# Altium PCB LM317T_PCB.PcbDoc
Units mm, origin at the board's own origin, x right, y up, seen from the top; angles counter-clockwise.
Board outline 70 x 40 mm, 2 copper layers (Top Layer, Bottom Layer); 14 components, 7 nets, 34 pads, 0 vias.
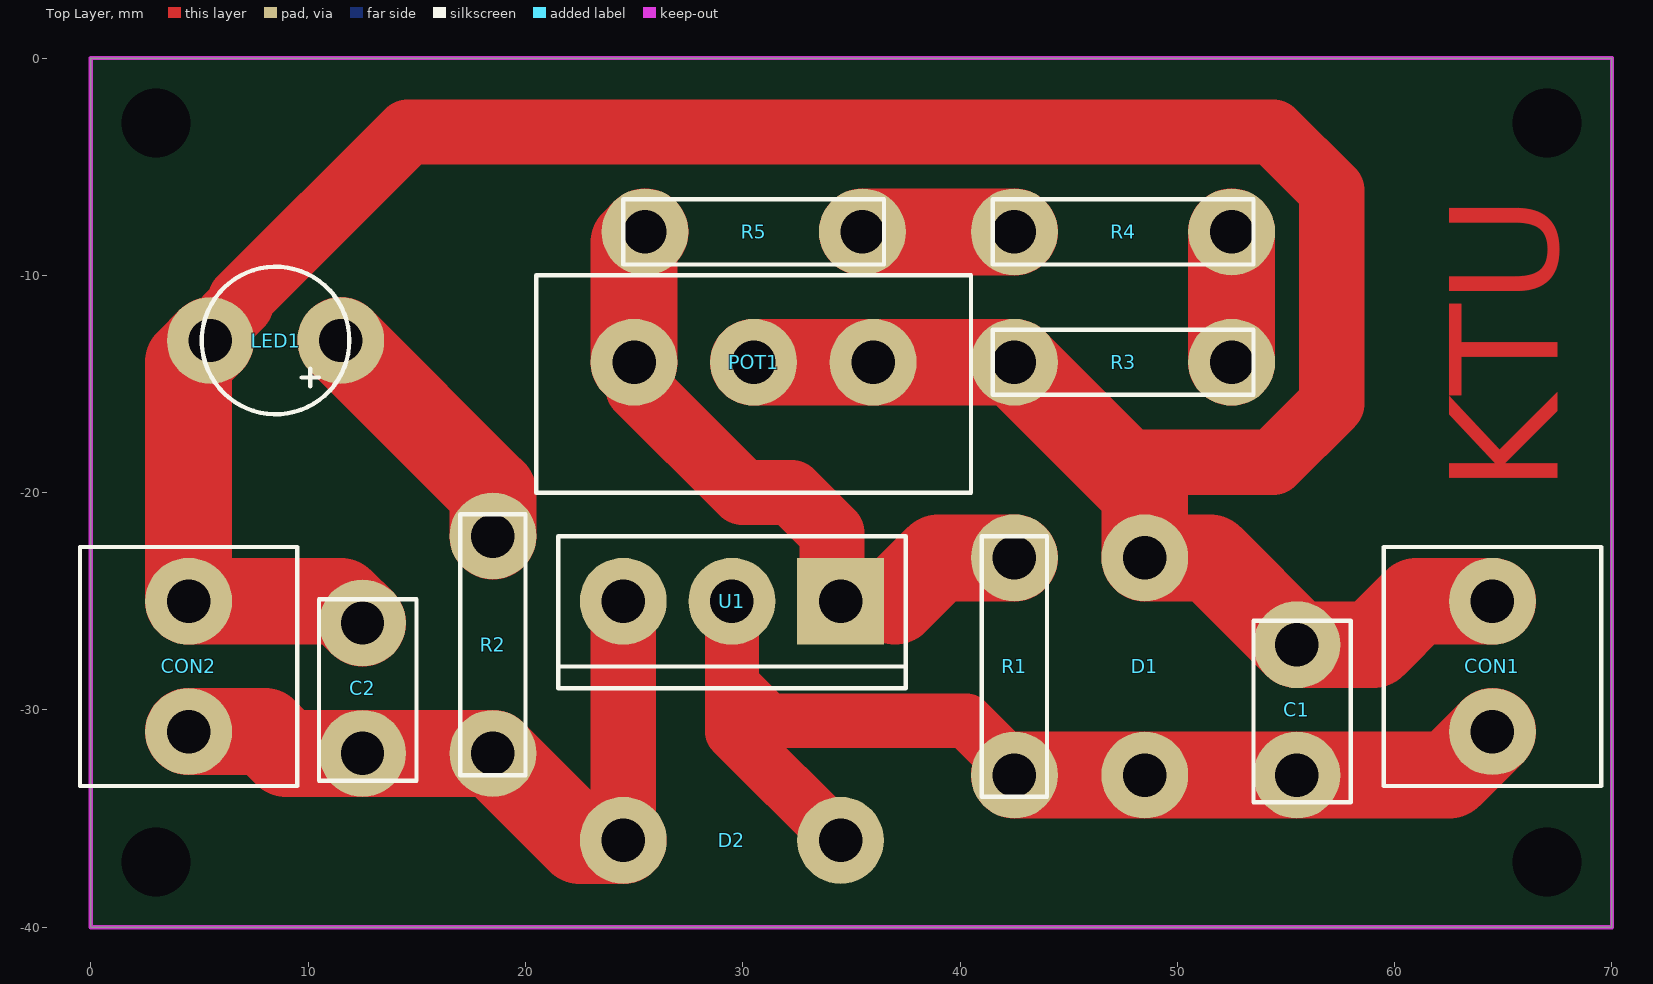
[diagram p0: Top Layer view]
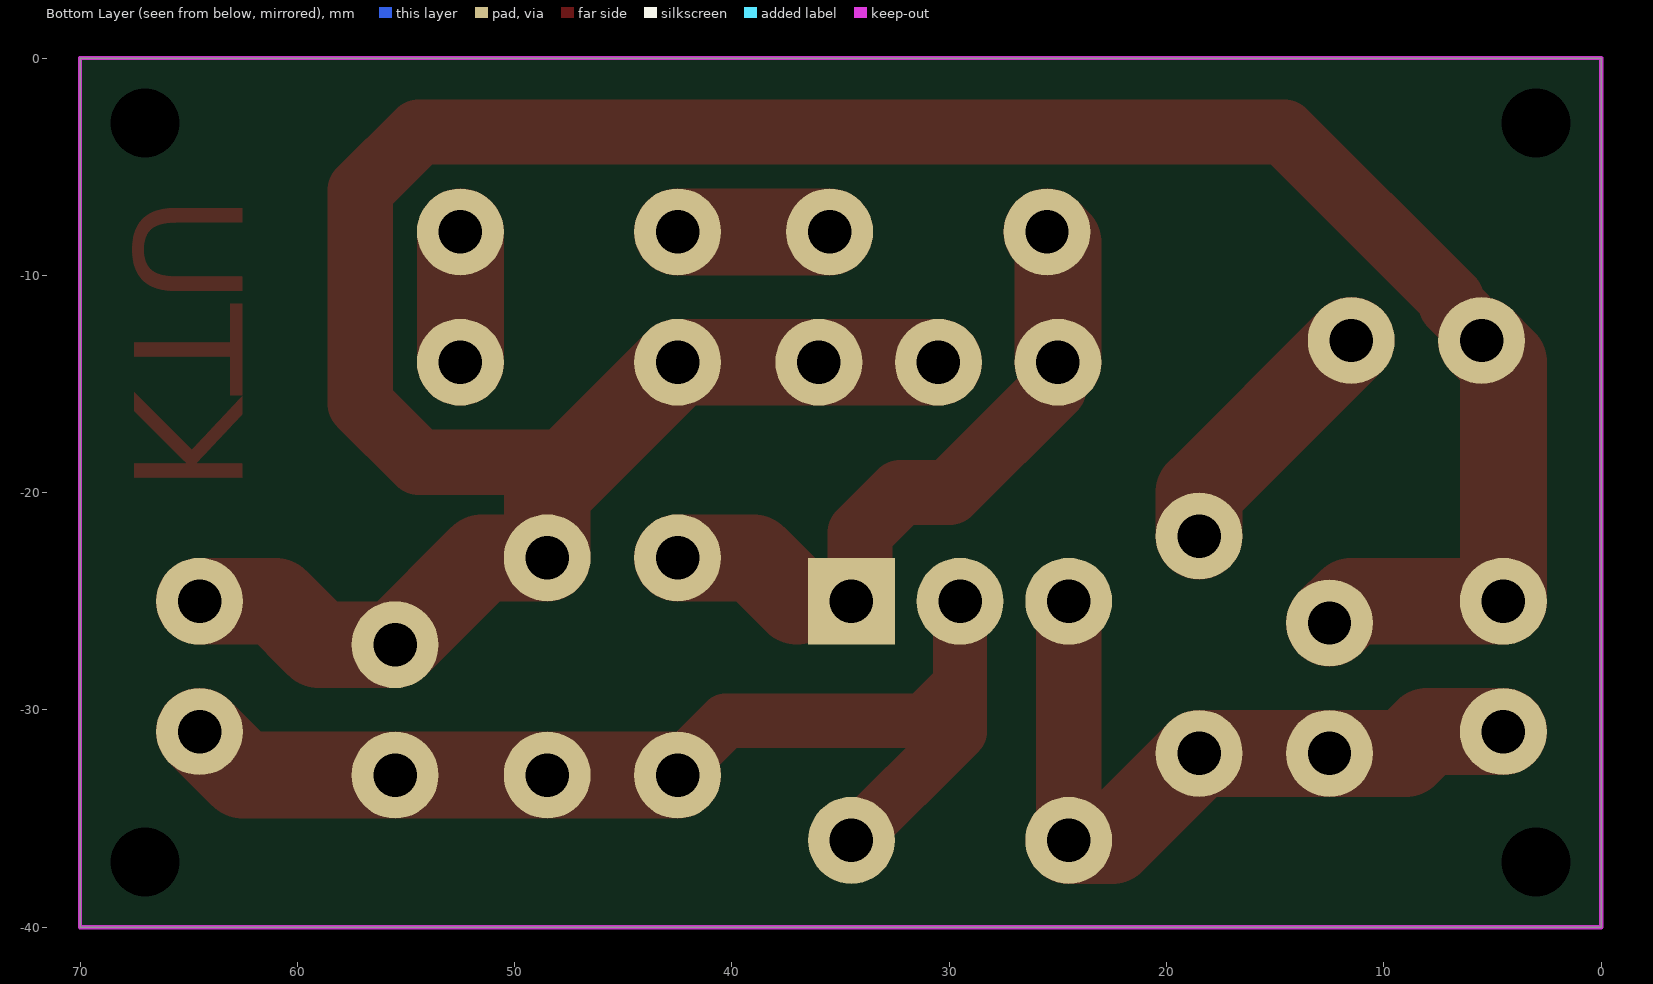
[diagram p1: Bottom Layer view, seen from below]
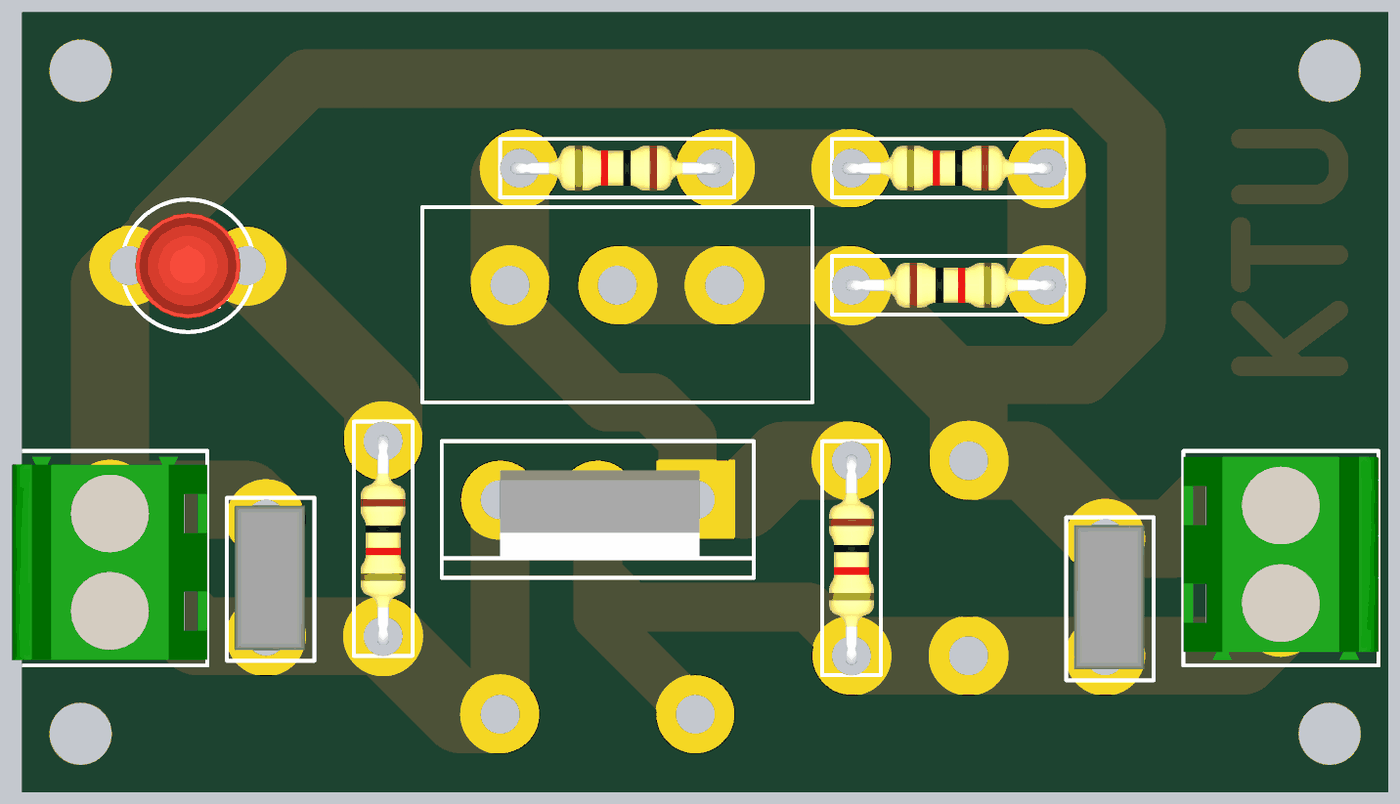
[diagram p2: 3D render of the assembled board from above, using the file's embedded part models]

## Layer stack, top to bottom
Top Solder: solder mask 0.0102, Solder Resist, Dk 3.5
Top Layer: signal copper 0.0356
Dielectric 1: dielectric 0.32, FR-4, Dk 4.8
Bottom Layer: signal copper 0.0356
Bottom Solder: solder mask 0.0102, Solder Resist, Dk 3.5

## Board outline
0,-40 70,-40 70,0 0,0

## Design rules (kind name [scope] priority, off if disabled: settings)
Clearance [All] p1: gap=1.1 ignorepadtopadclearanceinfootprint=FALSE
PlaneClearance [All] p1: clearance=2
PlaneConnect [All] p1: planeconnectstyle=Relief reliefexpansion=2 reliefentries=4 reliefconductorwidth=1 reliefairgap=0.5
PolygonConnect [All] p1: connectstyle=Relief reliefconductorwidth=1 reliefentries=4 polygonreliefangle="90 Angle" airgapwidth=0.2
RoutingVias [All] p1: holewidth=0.711 width=1.27 viastyle="Through Hole" minholewidth=0.711 minwidth=1.27 maxholewidth=0.711 maxwidth=1.27
SolderMaskExpansion [All] p1: expansion=0.102 istentingtop=FALSE
SupplyNets "Schematic Supply Nets" [InNet('GND')] p1: voltage=0.000
Width [All] p1: maxlimit=4 minlimit=2 preferedwidth=3
28 further rules are at their usual default settings.

## Components (designator, comment, footprint, x,y, rotation, side; value= is the part's Value field where it differs from the comment)
C1 "Film" CAP_Film 55.5,-30 r270 top
C2 "Film" CAP_Film 12.5,-29 r270 top
CON1 "CONNECTOR*2" CONNECTOR*2 64.5,-28 r90 top
CON2 "CONNECTOR*2" CONNECTOR*2 4.5,-28 r270 top
D1 "1N4001" "1N4001 Diyot" 48.5,-28 r90 top
D2 "1N4001" "1N4001 Diyot" 29.5,-36 r0 top
LED1 "LED" LED 8.5,-13 r180 top
POT1 "POT" POT 30.5,-14 r180 top
R1 "RES_1/4W" RES_1/4W 42.5,-28 r270 top
R2 "RES_1/4W" RES_1/4W 18.5,-27 r270 top
R3 "RES_1/4W" RES_1/4W 47.5,-14 r0 top
R4 "RES_1/4W" RES_1/4W 47.5,-8 r180 top
R5 "RES_1/4W" RES_1/4W 30.5,-8 r180 top
U1 "TO-220" TO-220 29.5,-25 r180 top

## Footprints (in the part's own frame and the unit in brackets; to place one, negate y for a bottom-side part, rotate by r counter-clockwise, add the part's x,y. Pads: shape width x height; smd on the part's side, far side on the other; paste and mask are expansions set on the pad)
"1N4001 Diyot" [mm]
  round 4 hole 2 mask+0.05: 1(-5,0) 2(5,0)
CAP_Film [mm]
  round 4 hole 2 mask+0.05: 1(-3,0) 2(3,0)
  silkscreen extent -4.1,-2 4.25,2.48, body extent -3.7,-1.6 3.7,2, height 7.6
CONNECTOR*2 [mm]
  round 4 hole 2 mask+0.05: 1(-3,0) 2(3,0)
  silkscreen extent -5.5,-5 5.5,5, body extent -5.2,-5 5.2,5, height 15.49
LED [mm]
  round 4 hole 2 mask+0.05: 1(-3,0) 2(3,0)
  silkscreen extent -3.4,-3.39 3.39,3.39, body extent -2.7,-2.7 2.7,2.7, height 8.5
POT [mm]
  round 4 hole 2 mask+0.05: 1(-5.5,0) 2(0,0) 3(5.5,0)
  silkscreen extent -10,-4 10,6, body extent -9.29,-20 9,8, height 22.15
RES_1/4W [mm]
  round 4 hole 2 mask+0.05: 1(-5,0) 2(5,0)
  silkscreen extent -6,-1.5 6,1.5, body extent -5.3,-1.16 5.46,1.16, height 2.93
TO-220 [mm]
  rect 4x4 hole 2 mask+0.05: 1(-5,0)
  round 4 hole 2 mask+0.05: 2(0,0) 3(5,0)
  silkscreen extent -8,-3 8,4, body extent -5.2,-1.5 5,3, height 15

## Part data
C1 C2: library part CAP_Film, Capacitor Type=Aluminium, Manufacturer=Nichicon, Manufacturer Part Number=UCY2G150MPD, Max Operating Temperature=105°C, Min Operating Temperature=-40°C, Package Style=RadialMeter, Rated DC Voltage (URdc)=400V, Ripple Current=180mA, Supplier Part Number=647-UCY2G150MPD, Tolerance  (fill in as +-)=20%, Category="Aluminum Electrolytic Capacitors", ComponentLink1Description=https://datasheet.ciiva.com:443/pdfs/VipMasterIC/IC/NICH/NICH-S-A0003527728/NICH-S-A0003527728-1.pdf?src-supplier=IHS+Markit, ComponentLink1URL=https://datasheet.ciiva.com:443/pdfs/VipMasterIC/IC/NICH/NICH-S-A0003527728/NICH-S-A0003527728-1.pdf?src-supplier=IHS+Markit, ComponentLink2Description=https://datasheet.ciiva.com/114/e-cy-114566.pdf?src-supplier=Digikey, ComponentLink2URL=https://datasheet.ciiva.com/114/e-cy-114566.pdf?src-supplier=Digikey, ComponentLink3Description=https://datasheet.ciiva.com/11686/e-cy-11686537.pdf?src-supplier=Avnet, ComponentLink3URL=https://datasheet.ciiva.com/11686/e-cy-11686537.pdf?src-supplier=Avnet, ComponentLink4Description=https://datasheet.ciiva.com/5329/e-cy-8386-5329868.pdf?src-supplier=Mouser, ComponentLink4URL=https://datasheet.ciiva.com/5329/e-cy-8386-5329868.pdf?src-supplier=Mouser, Diameter=10mm, Dielectric Material=Aluminium, JESD-609 Code=e3, Length=20mm, Packaging=Bulk, Pins=2, Polarity=Polarized, Pricing="1=1,25, 10=0,861, 50=0,861, 100=0,632, 1000=0,491, 10000=0,425 (USD)", Reach SVHC Compliant=No, RoHS=Yes, RoHS Compliant=Yes, Stock=1314, Supplier=Mouser, Terminal Finish=Copper, Terminal Pitch=5mm, Tolerance (fill in as +-)=20%
D1 D2: library part "1N4001 Diyot"

## Free pads (board coordinates)
  round 3 hole 3.175 mask+0.05: 1(3,-3) 2(3,-37) 3(67,-37) 4(67,-3)

## Nets (pads, with @x,y where several pads share a name; then routed paths per layer and width w, separated by ;. In a path a pad name is that pad's centre, name@x,y a point inside that pad or via, vN(x,y) a via of type N, cw(c..) or ccw(c..) an arc to the next point about the centre after c; other vN are vias at no path point)
GND: C1.1 C2.1 CON1.2 CON2.1 D1.2 LED1.2 POT1.1 POT1.2 R3.1 | length 147.2
  Top Layer w3: LED1.2 5.5,-12.729 6.9,-11.329 6.9,-11.095 14.595,-3.4 54.405,-3.4 57.1,-6.095 57.1,-15.905 54.405,-18.6 47.1,-18.6 R3.1
  Top Layer w4: LED1.2 4.5,-14 CON2.1 11.5,-25 C2.1 ; POT1.2 POT1.1 R3.1 48.5,-20 D1.2 51.5,-23 C1.1 59,-27 61,-25 CON1.2
NetC1_2: C1.2 CON1.1 D1.1 D2.2 R1.2 U1.2 | length 50.8
  Top Layer w2.5: U1.2 29.5,-28.823 ; D2.2 29.5,-31 29.5,-28.823 ; R1.2 42.5,-32.714 40.286,-30.5 31.177,-30.5 29.5,-28.823
  Top Layer w4: R1.2 D1.1 C1.2 62.5,-33 CON1.1
NetC2_2: C2.2 CON2.2 D2.1 R2.2 U1.3 | length 33.1
  Top Layer w3: D2.1 U1.3
  Top Layer w4: CON2.2 8,-31 9,-32 C2.2 R2.2 22.5,-36 D2.1
NetLED1_1: LED1.1 R2.1 | length 11.9
  Top Layer w4: LED1.1 18.5,-20 R2.1
NetPOT1_3: POT1.3 R1.1 R5.2 U1.1 | length 31
  Top Layer w3: POT1.3@25,-14.271 25.191,-14.462 25.191,-15.197 29.995,-20 32.243,-20 34.1,-21.857 34.1,-24.6 U1.1 37,-25
  Top Layer w4: POT1.3 25,-8.5 R5.2 ; 37,-25 39,-23 R1.1
NetR3_2: R3.2 R4.1 | length 6
  Top Layer w4: R3.2 R4.1
NetR4_2: R4.2 R5.1 | length 7
  Top Layer w4: R5.1 R4.2

## Keep-outs
Keep-Out Layer:
  the board outline again, w0.2

## Other copper
Top Layer:
  text "KTU" at 67.5,-20 h5 r90